# EAGLE board ir_remote_2 (EAGLE 7.3.0)

Size 25.5 x 39.5 mm. Coordinates in mm from the lower left corner, seen from the top.
Outline: 0.4,12 arc90 0,11.6 0,0.4 arc90 0.4,0 19,0 arc90 25.5,6 25.5,38.5 arc90 24.5,39.5 12,39.5 arc90 11,38.5 11,13 arc-90 10,12 0.4,12
Copper layers (1*16): Top 0.0356mm / dielectric 1.5011mm / Bottom 0.0356mm
Design rules "LaenPCBOrder": minimum track width 6mil, minimum drill 13mil, track to track 6mil, track to pad 6mil, pad to pad 6mil, via to via 6mil, smd to smd 6mil, copper to edge 15mil, drill to drill 6mil, minimum pad ring 7mil, minimum via ring 7mil, stop-mask expansion 3mil, vias tented up to drill 0mil, thermal gap 10mil

## Footprints (pad centres in the part's own frame; a part is rotated, then mirrored left to right if it is on the bottom)
PAD.03X.05 = smd 1.27 x 1.27: P$1 0,0
0603-CAP = smd 1.1 x 1: 1 -0.85,0; 2 0.85,0
5MM-SIDE = smd 1.651 x 5.08: A -1.27,0; K 1.27,0
LED-0603 = smd 1 x 1: A 0,-0.877; C 0,0.877
SOT-23-R = smd 0.5 x 0.75: 1-BASE -0.9,-1; 2-COLLECTOR 0,1; 3-EMITTER 0.9,-1
0603-RES = smd 1.1 x 1: 1 -0.85,0; 2 0.85,0
TQFP32-08 = smd 1.27 x 0.559: 1 -4.293,2.8; 2 -4.293,2; 3 -4.293,1.2; 4 -4.293,0.4; 5 -4.293,-0.4; 6 -4.293,-1.2; 7 -4.293,-2; 8 -4.293,-2.8; 17 4.293,-2.8; 18 4.293,-2; 19 4.293,-1.2; 20 4.293,-0.4; 21 4.293,0.4; 22 4.293,1.2; 23 4.293,2; 24 4.293,2.8 | smd 0.559 x 1.27: 9 -2.8,-4.293; 10 -2,-4.293; 11 -1.2,-4.293; 12 -0.4,-4.293; 13 0.4,-4.293; 14 1.2,-4.293; 15 2,-4.293; 16 2.8,-4.293; 25 2.8,4.293; 26 2,4.293; 27 1.2,4.293; 28 0.4,4.293; 29 -0.4,4.293; 30 -1.2,4.293; 31 -2,4.293; 32 -2.8,4.293
USB-A-PCB-POWER-ONLY = smd 7.5 x 1.5: 5V -0.2,-3.5; GND -0.2,3.5
RESONATOR-SMD = smd 0.45 x 1.905: 1 -1.2,0; 2 0,0; 3 1.2,0

## Placement (x,y rotation side)
5V  [PAD.03X.05]  15.16,5.63 180 top
C1  4.7uF  [0603-CAP]  22.7,23.55 180 top
C2  4.7uF  [0603-CAP]  13.7,23.55 0 top
C3  4.7uF  [0603-CAP]  13.72,24.96 0 top
C4  4.7uF  [0603-CAP]  22.7,25.05 180 top
C5  4.7uF  [0603-CAP]  13.7,22.1 0 top
C6  4.7uF  [0603-CAP]  22.7,22.1 180 top
C7  0.1uF  [0603-CAP]  17.73,19.42 90 top
LED1  LED  [5MM-SIDE]  15.25,35.2 180 top
LED3  LED  [5MM-SIDE]  21.25,35.2 180 top
LED4  [LED-0603]  19.15,24.1 180 top
MISO  [PAD.03X.05]  15.16,3.09 180 top
MOSI  [PAD.03X.05]  17.7,5.63 180 top
Q1  [SOT-23-R]  20.2,19.35 90 top
Q2  [SOT-23-R]  15.75,27.55 0 top
Q9  [SOT-23-R]  20.7,27.55 0 top
R1  1k  [0603-RES]  18.25,21.85 0 top
R2  100  [0603-RES]  19,30.8 90 top
R3  100  [0603-RES]  20.2,30.8 90 top
R4  100  [0603-RES]  21.4,30.8 90 top
R5  10k  [0603-RES]  22.83,18.68 270 top
R6  10k  [0603-RES]  17.35,24.1 90 top
R7  100  [0603-RES]  22.6,30.8 90 top
R8  100  [0603-RES]  23.8,30.8 90 top
R9  100  [0603-RES]  17.5,30.8 90 top
R10  100  [0603-RES]  12.7,30.8 90 top
R11  100  [0603-RES]  15.1,30.8 90 top
R12  100  [0603-RES]  13.9,30.8 90 top
R13  100  [0603-RES]  16.3,30.8 90 top
RST  [PAD.03X.05]  20.24,3.09 180 top
SCK  [PAD.03X.05]  17.7,3.09 180 top
U1  ATMEGA328P  [TQFP32-08]  17.8,12.1 270 top
U$1  USB-POWER-ONLY  [USB-A-PCB-POWER-ONLY]  5,6 0 top
Y1  18MHZ  [RESONATOR-SMD]  14.75,19.34 180 top

## Library data of the parts
5V MISO MOSI RST SCK = SparkFun-Passives
C1-C7 LED4 R1-R13 = homemade-hardware
LED1 LED3 = tvbgone
Q1 Q2 Q9 = Tomorrow_Lab_LLC
U1 = SparkFun-DigitalIC; PROD_ID: IC-09069
U$1 = Andy_Sigler
Y1 = homemade-hardware; PROD_ID: XTAL-08895

## Nets
GND: C1.2 C2.2 C3.2 C4.2 C5.2 C6.2 C7.2 Q2.3-EMITTER Q9.3-EMITTER R1.1 R6.1 U1.3 U1.5 U1.21 U$1.GND Y1.2
MISO: MISO.P$1 U1.16
MOSI: MOSI.P$1 U1.15
N$1: U1.8 Y1.3
N$2: U1.7 Y1.1
N$3: LED4.C R1.2
N$4: Q2.2-COLLECTOR R9.1 R10.1 R11.1 R12.1 R13.1
N$6: Q1.1-BASE U1.1
N$8: LED1.K R9.2 R10.2 R11.2 R12.2 R13.2
N$10: LED4.A Q1.3-EMITTER Q2.1-BASE Q9.1-BASE R6.2
N$11: Q9.2-COLLECTOR R2.1 R3.1 R4.1 R7.1 R8.1
N$12: LED3.K R2.2 R3.2 R4.2 R7.2 R8.2
RST: R5.2 RST.P$1 U1.29
SCK: SCK.P$1 U1.17
VCC: 5V.P$1 C1.1 C2.1 C3.1 C4.1 C5.1 C6.1 C7.1 LED1.A LED3.A Q1.2-COLLECTOR R5.1 U1.4 U1.6 U1.18 U$1.5V

## Tracks (layer width: path | path; a pad name or v marks a point on that pad's centre or on a via)
GND  (15 unrouted)
MISO  (1 unrouted)
MOSI  (1 unrouted)
N$1  (1 unrouted)
N$2  (1 unrouted)
N$3  (1 unrouted)
N$4  (5 unrouted)
N$6  (1 unrouted)
N$8  (5 unrouted)
N$10  (4 unrouted)
N$11  (5 unrouted)
N$12  (5 unrouted)
RST  (2 unrouted)
SCK  (1 unrouted)
VCC  (15 unrouted)

## Text on the board
tPlace: GND | 5V
bPlace: IR-REMOTE | Intro to PCB Fab / ITP Fall '16